# Altium PCB pcb.pcbdoc
Units mil, origin at the board's own origin, x right, y up, seen from the top; angles counter-clockwise.
Board outline 3500 x 2000 mil, 2 copper layers (Top Layer, Bottom Layer); 8 components, 3 nets, 16 pads, 1 vias.
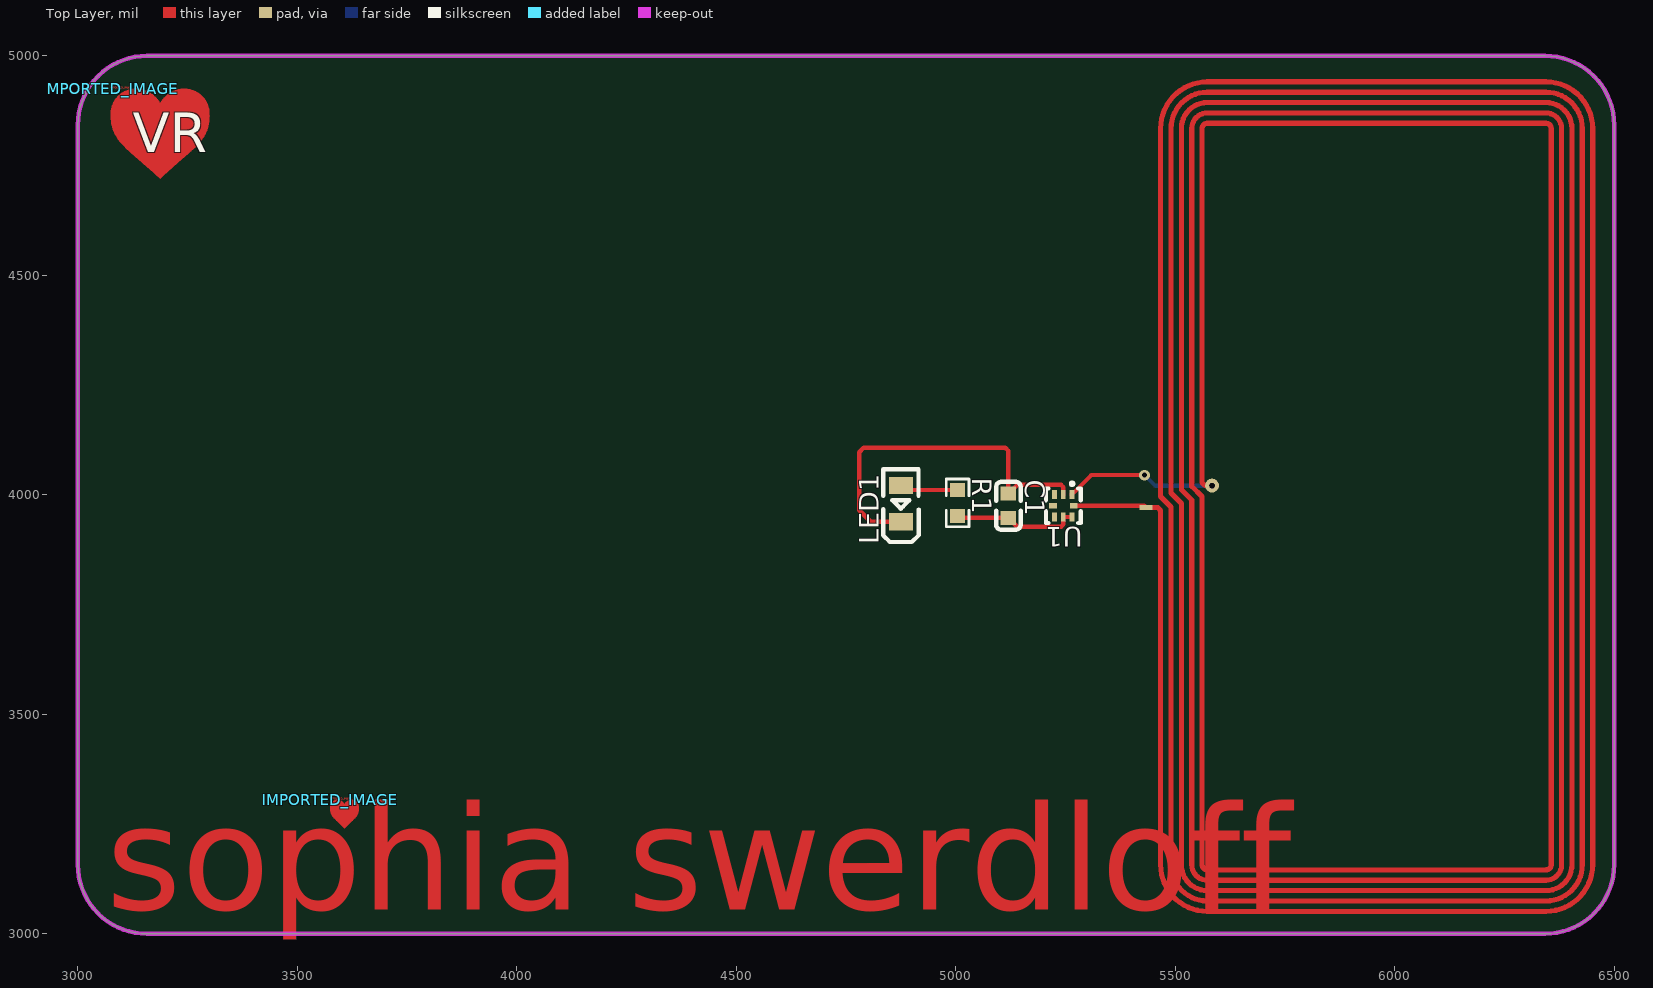
[diagram p0: Top Layer view]
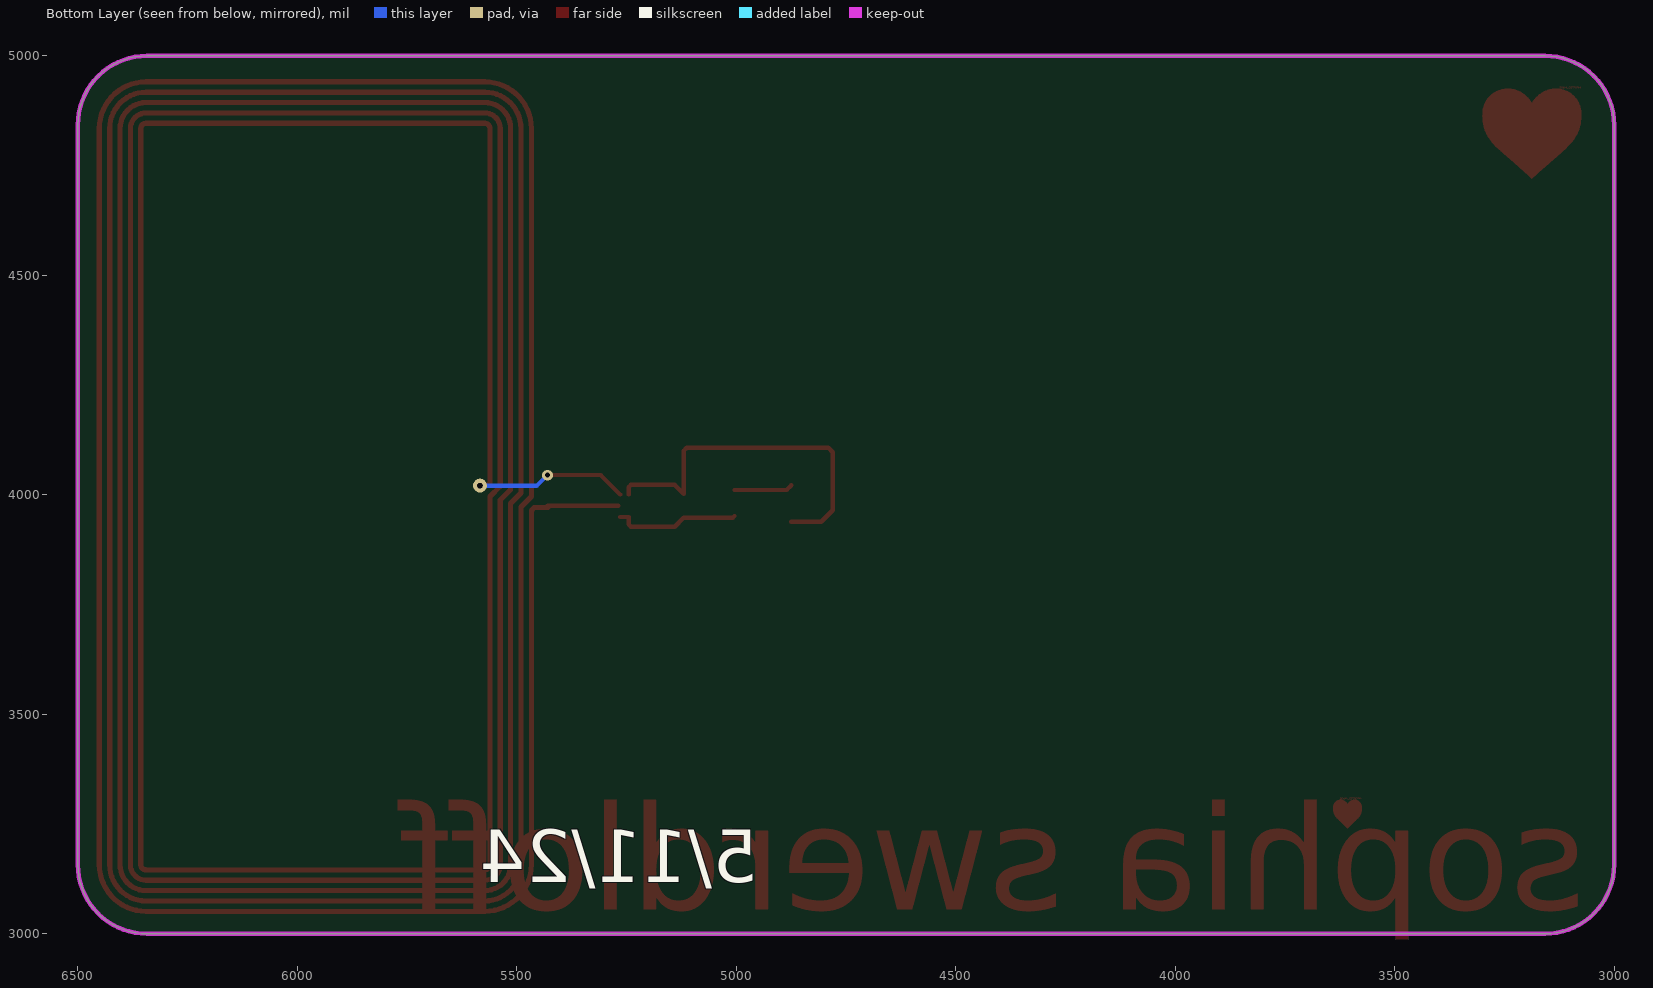
[diagram p1: Bottom Layer view, seen from below]

## Layer stack, top to bottom
Top Layer: signal copper (thickness not stored)
Dielectric: dielectric 12.6, FR-4, Dk 4.8
Bottom Layer: signal copper (thickness not stored)

## Board outline
3157.48,5000 6342.52,5000 cw(c6342.52,4842.52) 6500,4842.52 6500,3157.48 cw(c6342.52,3157.48) 6342.52,3000 3157.48,3000 cw(c3157.48,3157.48) 3000,3157.48 3000,4842.52 cw(c3157.48,4842.52)

## Design rules (kind name [scope] priority, off if disabled: settings)
BoardOutlineClearance copperThickness1oz [All] p0: genericclearance=10 ignorepadtopadclearanceinfootprint=FALSE except(0: Arc-SplitContinuation Track-SplitContinuation SMDPad-SplitContinuation THPad-SplitContinuation Via-SplitContinuation Fill-SplitContinuation Poly-SplitContinuation Region-SplitContinuation Text-SplitContinuation; 6: Track-CutoutEdge SMDPad-CutoutEdge THPad-CutoutEdge Via-CutoutEdge Region-CutoutEdge; 11.8: Track-OutlineEdge SMDPad-OutlineEdge THPad-OutlineEdge Via-OutlineEdge Fill-OutlineEdge Region-OutlineEdge Poly-OutlineEdge Text-OutlineEdge Fill-CutoutEdge)
BoardOutlineClearance copperThickness2oz [All] p0: genericclearance=10 ignorepadtopadclearanceinfootprint=FALSE except(0: Arc-SplitContinuation Track-SplitContinuation SMDPad-SplitContinuation THPad-SplitContinuation Via-SplitContinuation Fill-SplitContinuation Poly-SplitContinuation Region-SplitContinuation Text-SplitContinuation; 6: Track-CutoutEdge SMDPad-CutoutEdge THPad-CutoutEdge Via-CutoutEdge Region-CutoutEdge; 11.8: Track-OutlineEdge SMDPad-OutlineEdge THPad-OutlineEdge Via-OutlineEdge Fill-OutlineEdge Region-OutlineEdge Poly-OutlineEdge Text-OutlineEdge Fill-CutoutEdge)
Clearance copperThickness1oz [(InNet('$1N531') OR InNet('$1N512') OR InNet('$1N562'))] p1: gap=7 ignorepadtopadclearanceinfootprint=FALSE except(4: Track-Track; 6: Track-SMDPad SMDPad-SMDPad Track-THPad SMDPad-THPad THPad-THPad Track-Via SMDPad-Via THPad-Via Via-Via SMDPad-Fill THPad-Fill Via-Fill Fill-Fill Track-Region SMDPad-Region THPad-Region Via-Region Region-Region Track-Poly SMDPad-Poly THPad-Poly Via-Poly Fill-Poly Region-Poly Poly-Poly Track-Text SMDPad-Text THPad-Text Via-Text Fill-Text Region-Text Poly-Text Text-Text; 6.9: Track-Hole SMDPad-Hole THPad-Hole Via-Hole Fill-Hole Region-Hole Poly-Hole Text-Hole Sheet-Hole; 11.8: Track-Fill Fill-Region Track-Sheet SMDPad-Sheet THPad-Sheet Via-Sheet Fill-Sheet Region-Sheet Poly-Sheet Text-Sheet)
Clearance copperThickness2oz [All] p1: gap=7 ignorepadtopadclearanceinfootprint=FALSE except(6: Track-SMDPad SMDPad-SMDPad Track-THPad SMDPad-THPad THPad-THPad Track-Via SMDPad-Via THPad-Via Via-Via SMDPad-Fill THPad-Fill Via-Fill Fill-Fill Track-Region SMDPad-Region THPad-Region Via-Region Region-Region Track-Poly SMDPad-Poly THPad-Poly Via-Poly Fill-Poly Region-Poly Poly-Poly Track-Text SMDPad-Text THPad-Text Via-Text Fill-Text Region-Text Poly-Text Text-Text; 6.9: Track-Hole SMDPad-Hole THPad-Hole Via-Hole Fill-Hole Region-Hole Poly-Hole Text-Hole Sheet-Hole; 8: Track-Track; 11.8: Track-Fill Fill-Region Track-Sheet SMDPad-Sheet THPad-Sheet Via-Sheet Fill-Sheet Region-Sheet Poly-Sheet Text-Sheet)
DiffPairsRouting differentialPair [All] p1: maxuncoupledlength=10 minlimit=6 maxlimit=6 mostfreqgap=6 toplayer_minwidth=5 toplayer_prefwidth=10 toplayer_maxwidth=100 bottomlayer_minwidth=5 bottomlayer_prefwidth=10 bottomlayer_maxwidth=100
PasteMaskExpansion pasteMaskExpansion [All] p1: expansion=0
PlaneConnect innerPlane [All] p1: planeconnectstyle=Relief reliefexpansion=20 reliefentries=4 reliefconductorwidth=10 reliefairgap=10
PolygonConnect copperRegion [All] p1: connectstyle=Relief reliefentries=4 reliefconductorwidth=10 polygonreliefangle="90 Angle" airgapwidth=10
RoutingVias viaSize [All] p1: viastyle="Through Hole" holewidth=12.0078 minholewidth=11.811 maxholewidth=248.0314 width=24.0158 minwidth=19.685 maxwidth=393.7008
SolderMaskExpansion solderMaskExpansion [All] p1: useseparateexpansions=TRUE expansion=2 expansionbottom=2
Width copperThickness1oz [All] p1: maxlimit=100 minlimit=5 preferedwidth=10
Width copperThickness2oz [All] p1: maxlimit=100 minlimit=8 preferedwidth=10

## Components (designator, comment, footprint, x,y, rotation, side; value= is the part's Value field where it differs from the comment)
C1 "" C0603 5120,3975 r270 top
IMPORTED_IMAGE "IMPORTED_IMAGE" IMPORTED_IMAGE#1 3575,3305 r0 top
IMPORTED_IMAGE "IMPORTED_IMAGE" IMPORTED_IMAGE#2 3575,3305 r0 top
IMPORTED_IMAGE "IMPORTED_IMAGE" IMPORTED_IMAGE#3 3075,4925 r0 top
IMPORTED_IMAGE "IMPORTED_IMAGE" IMPORTED_IMAGE#1 3075,4925 r0 top
LED1 "" LED0805-R-RD 4875,3980 r90 top
R1 "" R0603 5004.14,3981.3 r270 top
U1 "" XQFN-8_L1.6-W1.6-P0.50-BL_NT3H2111W0FHKH 5245,3975 r180 top

## Footprints (in the part's own frame and the unit in brackets; to place one, negate y for a bottom-side part, rotate by r counter-clockwise, add the part's x,y. Pads: shape width x height; smd on the part's side, far side on the other; paste and mask are expansions set on the pad)
C0603 [mm]
  rect 0.8x0.9 smd: 1(-0.7,0) 2(0.7,0)
  silkscreen extent -1.39,-0.71 1.39,0.71
IMPORTED_IMAGE#1 [mil]
IMPORTED_IMAGE#2 [mil]
  Top Layer region: 327 vertices and 0 holes, not listed, extent 0,-65 65,0
IMPORTED_IMAGE#3 [mil]
  Top Layer region: 327 vertices and 0 holes, not listed, extent 0,-205 225,0
LED0805-R-RD [mm]
  rect 1x1.4 smd: 1(1.05,0) 2(-1.05,0)
  silkscreen extent -2.22,-1.04 1.99,1.01
R0603 [mil]
  rect 31.75x34.02 smd: 1(-29.66,0) 2(29.66,0)
  silkscreen extent -55,-26 55,26
XQFN-8_L1.6-W1.6-P0.50-BL_NT3H2111W0FHKH [mm]
  rect 0.28x0.5 smd: 1(-0.5,-0.65) 2(0,-0.65) 3(0.5,-0.65) 5(0.5,0.65) 6(0,0.65) 7(-0.5,0.65)
  rect 0.45x0.3 smd: 4(0.6,0) 8(-0.6,0)
  silkscreen extent -1,-1.33 1,1

## Free pads (board coordinates)
  rect 29.53x11.81 smd: P$1(5433.86,3970.86)
  round 31.81 hole 11.82: P$2(5583.86,4020.86)

## Via types
v1: diameter 24.02, hole 12.01, Top Layer to Bottom Layer, 1 vias

## Nets (pads, with @x,y where several pads share a name; then routed paths per layer and width w, separated by ;. In a path a pad name is that pad's centre, name@x,y a point inside that pad or via, vN(x,y) a via of type N, cw(c..) or ccw(c..) an arc to the next point about the centre after c; other vN are vias at no path point)
$1N512: C1.1 LED1.2 U1.2 | length 834.8
  Top Layer w10: LED1.2 4806.35,3938.65 4780,3965 4780,4097.07 4790,4107.07 5112.93,4107.07 5120,4100 C1.1 5140,4022.56 5240,4022.56 5245,4017.56 U1.2
$1N531: C1.2 R1.2 U1.6 U1.7 | length 289.6
  Top Layer w10: R1.2 5008.34,3947.44 C1.2 5140,3927.44 5240,3927.44 5245,3932.44 U1.6 U1.7
$1N562: LED1.1 R1.1 | length 133.4
  Top Layer w10: LED1.1 4885.39,4010.96 R1.1
pads on no net: U1.1 U1.3 U1.4 U1.5 U1.8
copper on no net: | length 26900
  Top Layer w10: 5264.68,4000.59 5309.09,4045 v1(5430,4045) ; 5268.62,3975 5429.73,3975 5433.86,3970.86
  Top Layer w11.81: 5428.86,3970.86 5433.86,3970.86 5460.24,3970.86 5466.73,3964.36 5466.73,3157.28 ccw(c5573.03,3157.28) 5573.03,3050.98 6344.69,3050.99 ccw(c6344.69,3157.28) 6450.99,3157.28 6450.98,4834.44 ccw(c6344.69,4834.44) 6344.69,4940.74 5573.03,4940.74 ccw(c5573.03,4834.44) 5466.73,4834.44 5466.73,3995.86 5490.36,3972.24 5490.36,3157.28 ccw(c5573.05,3157.28) 5573.04,3074.61 6344.69,3074.61 ccw(c6344.69,3157.28) 6427.37,3157.28 6427.36,4834.44 ccw(c6344.69,4834.44) 6344.69,4917.12 5573.03,4917.12 ccw(c5573.05,4834.44) 5490.36,4834.44 5490.36,4003.74 5513.98,3980.11 5513.98,3157.28 ccw(c5573.03,3157.28) 5573.03,3098.22 6344.69,3098.22 ccw(c6344.69,3157.28) 6403.74,3157.28 6403.74,4834.44 ccw(c6344.69,4834.45) 6344.69,4893.51 5573.03,4893.51 ccw(c5573.03,4834.45) 5513.99,4834.45 5513.98,4011.61 5537.6,3987.99 5537.6,3157.28 ccw(c5573.03,3157.28) 5573.03,3121.86 6344.69,3121.86 ccw(c6344.69,3157.28) 6380.12,3157.28 6380.12,4834.44 ccw(c6344.69,4834.44) 6344.69,4869.88 5573.03,4869.88 ccw(c5573.03,4834.44) 5537.6,4834.44 5537.6,4019.49 5561.23,3995.86 5561.23,3157.28 ccw(c5573.03,3157.28) 5573.03,3145.47 6344.69,3145.47 ccw(c6344.69,3157.28) 6356.51,3157.28 6356.51,4834.44 ccw(c6344.69,4834.44) 6344.69,4846.26 5573.03,4846.26 ccw(c5573.03,4834.44) 5561.22,4834.44 5561.23,4027.36 5567.73,4020.86 5583.86,4020.86
  Bottom Layer w10: v1(5430,4045) 5454.14,4020.86 5583.86,4020.86

## Keep-outs
Board Outline Layer:
  the board outline again, w10

## Other copper
Top Layer:
  text "sophia swerdloff" at 3065,3055 h240

## Silkscreen, mask and mechanical layers (free items; w line width, h text height)
Top Silkscreen Layer:
  text "VR" at 3125,4780 h90
Bottom Silkscreen Layer:
  text "5/11/24" at 4950.45,3117 h120
Top Solder Mask Layer:
  text "sophia swerdloff" at 3065,3055 h240